# Altium PCB v1_long.PcbDoc (part 2 of 4)
Units mm, origin at the board's own origin, x right, y up, seen from the top; angles counter-clockwise.
Board outline 116.27 x 185.5 mm, 2 copper layers (Top Layer, Bottom Layer); 294 components, 195 nets, 982 pads, 413 vias.
Unrouted connection lines stored in the file: 3.
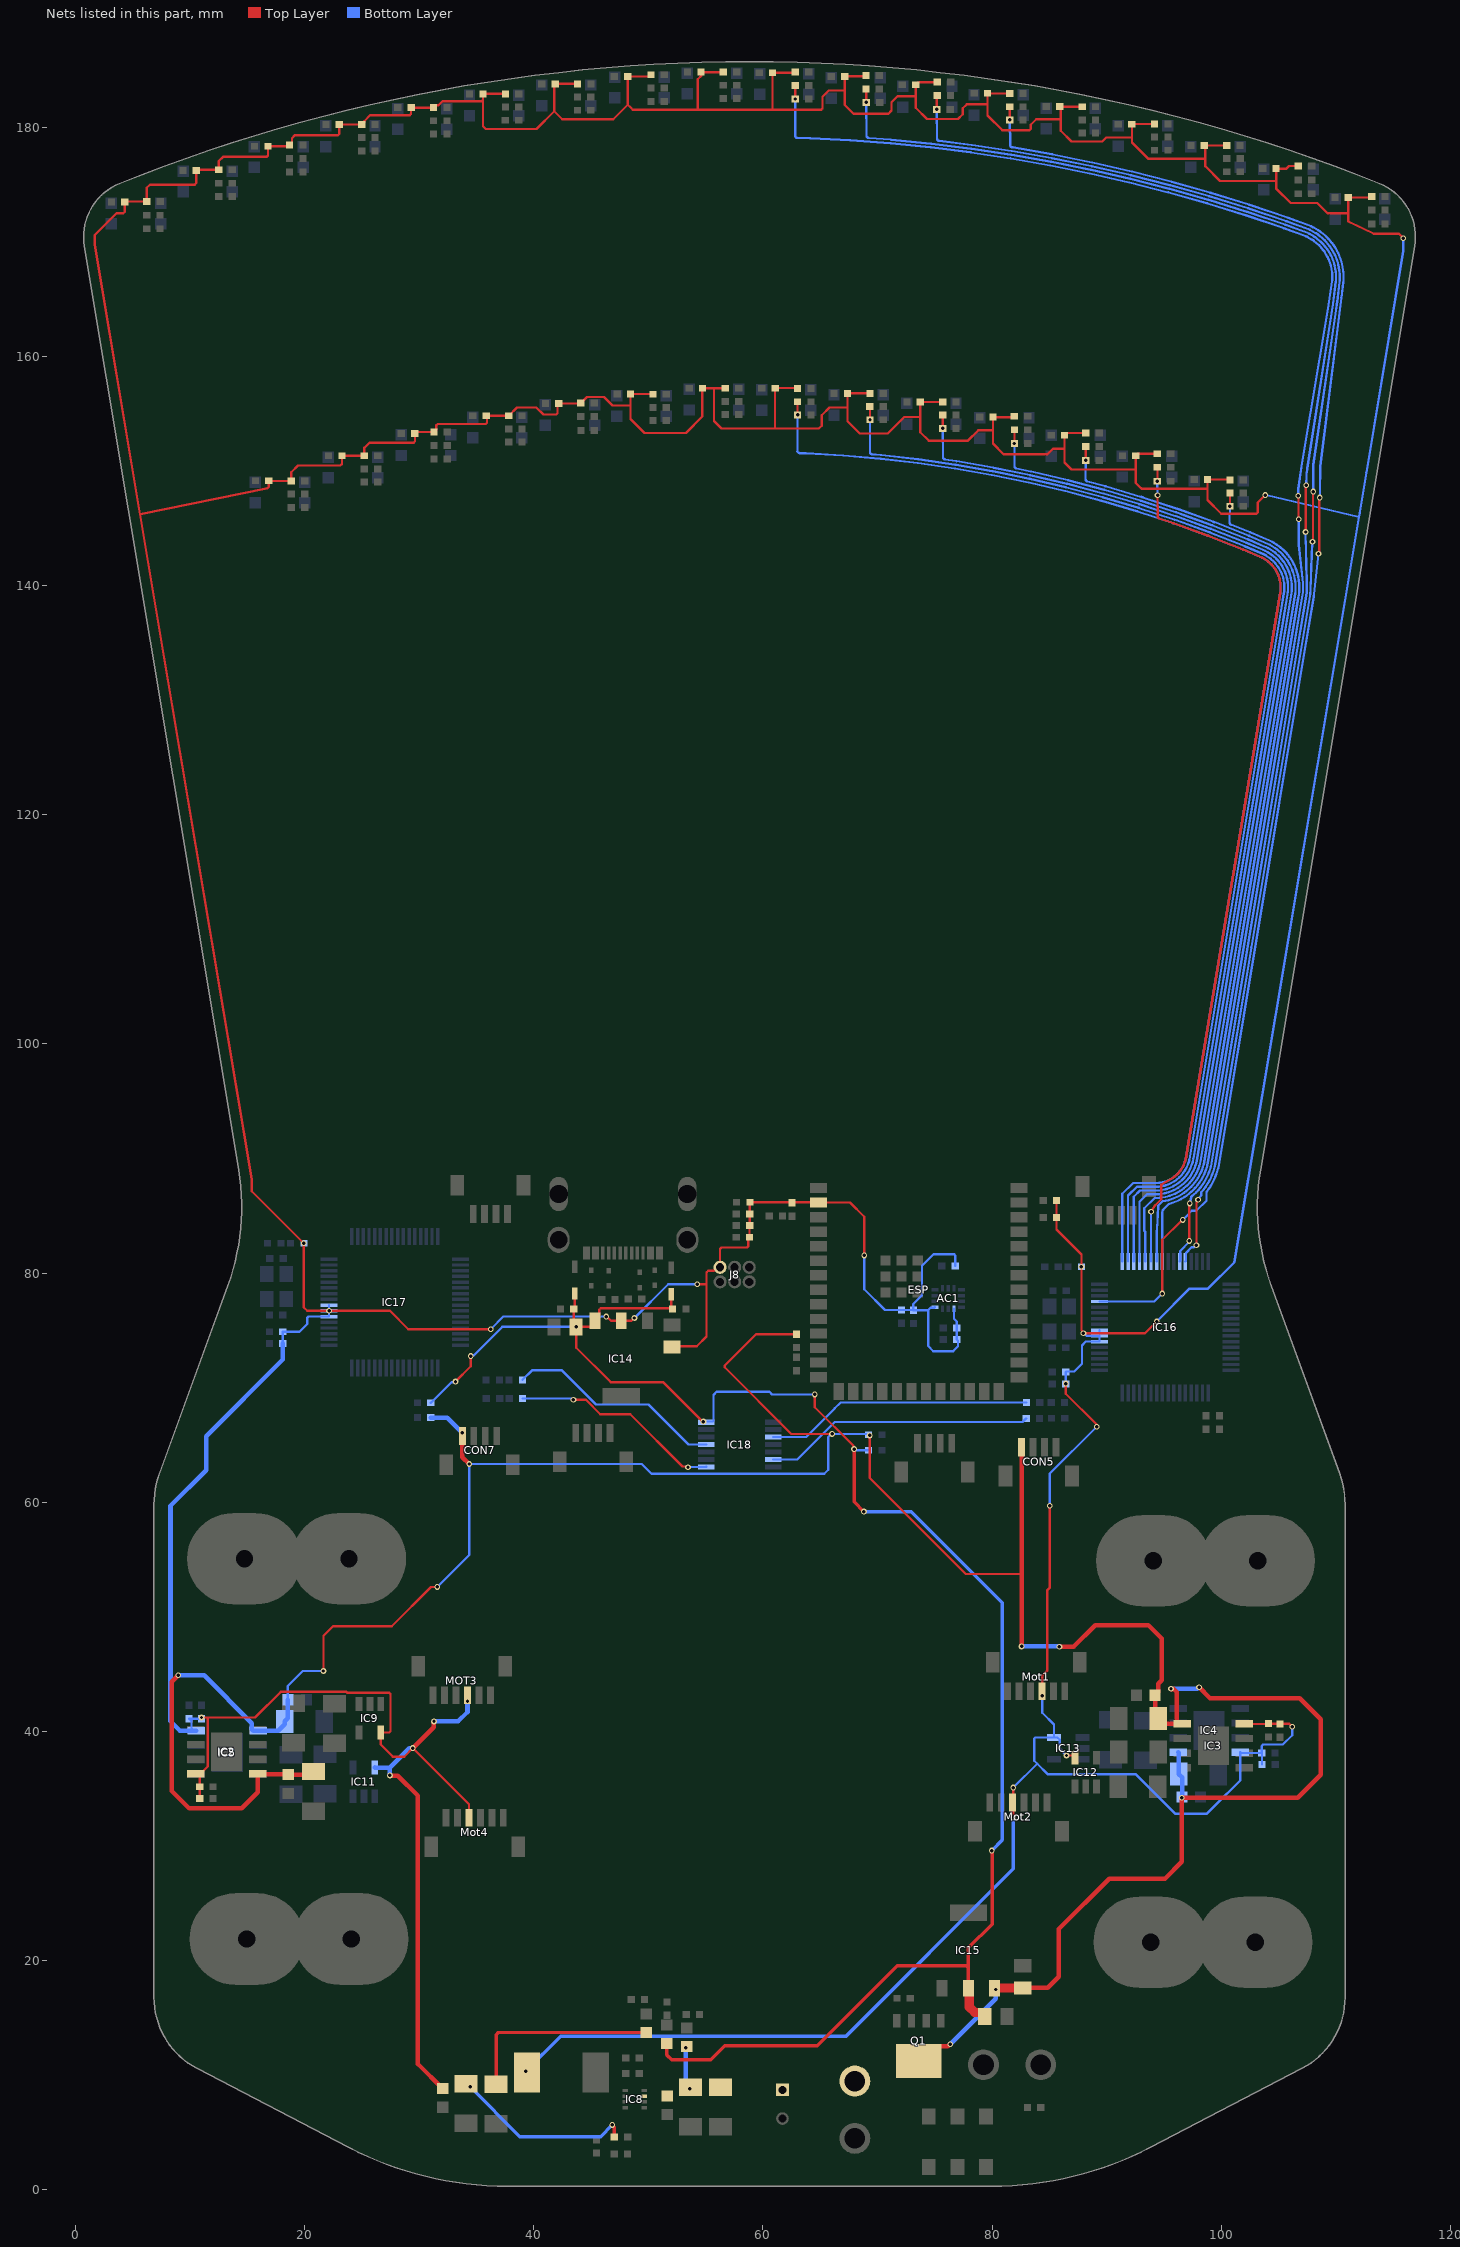
[diagram p2: the nets of this part, all layers, seen from the top]

## Part data
AC1: "Accelerometer", Manufacturer_Name=STMicroelectronics, Mouser Part Number=511-LSM6DSOXTR, Arrow Part Number=LSM6DSOXTR, Arrow Price/Stock=https://www.arrow.com/en/products/lsm6dsoxtr/stmicroelectronics?region=europe, Datasheet Link=https://www.st.com/resource/en/datasheet/lsm6dsox.pdf, Manufacturer_Part_Number=LSM6DSOXTR, Mouser Price/Stock=https://www.mouser.co.uk/ProductDetail/STMicroelectronics/LSM6DSOXTR?qs=l7cgNqFNU1i9dcjzItLpVQ%3D%3D
C1 C2 C4 C5 C6 C7 C8 C9 C10 C11 C12 C13 C14 C15 C16 C17 C18 C19 C20 C21 C22 C23 C24 C26 C27 C28 C30 C31 C32 C33 C34 C35 C36 C37 C38 C39 C40 C41 C42 C43 C44 C45 C46 C47 C48 C49 C50 C51 C52 C53A C53AA C53AB C53AC C53AD C53AE C53AF C53B C53C C53D C53E C53F C53G C53H C53I C53J C53K C53L C53M C53N C53O C53P C53Q C53R C53S C53T C53U C53V C53W C53X C53Y C53Z: library part Capacitor, "MLCC Capacitor"
C25: "Capacitor Polarised", Manufacturer_Name=Nichicon, Arrow Part Number=UVY1V101MED1TD, Arrow Price/Stock=https://www.arrow.com/en/products/uvy1v101med1td/nichicon, Datasheet Link=http://nichicon-us.com/english/products/pdfs/e-uvy.pdf, Height=12.5mm, Manufacturer_Part_Number=UVY1V101MED1TD
D3 D4 D5 D6: "TVS Diode (Bi-directional)", Manufacturer_Name=LRC, Height=0.7mm, Manufacturer_Part_Number=LESD5D5.0CT1G
"DC IN" Fan: "Connector", Manufacturer_Name=Amass, Datasheet Link=https://www.tme.eu/Document/4acc913878197f8c2e30d4b8cdc47230/XT30UPB%20SPEC.pdf, Height=10.7mm, Manufacturer_Part_Number=XT30PB
ESP: "Integrated Circuit", Manufacturer_Name="Espressif Systems", Mouser Part Number=356-ESP32S3WRM1N16R8, Datasheet Link=https://www.espressif.com/sites/default/files/documentation/esp32-s3-wroom-1_wroom-1u_datasheet_en.pdf, Height=3.25mm, Manufacturer_Part_Number=ESP32-S3-WROOM-1-N16R8, Mouser Price/Stock=https://www.mouser.co.uk/ProductDetail/Espressif-Systems/ESP32-S3-WROOM-1-N16R8?qs=Li%252BoUPsLEnvQc9gW6AMhZg%3D%3D
IC2 IC3 IC4 IC5: "Integrated Circuit", Manufacturer_Name="Texas Instruments", Mouser Part Number=595-DRV8251DDAR, Arrow Part Number=DRV8251DDAR, Arrow Price/Stock=https://www.arrow.com/en/products/drv8251ddar/texas-instruments?region=nac, Datasheet Link=https://www.arrow.com/en/products/drv8251ddar/texas-instruments?region=nac, Height=1.7mm, Manufacturer_Part_Number=DRV8251DDAR, Mouser Price/Stock=https://www.mouser.co.uk/ProductDetail/Texas-Instruments/DRV8251DDAR?qs=doiCPypUmgHTzZyfapGahQ%3D%3D
IC6 IC7: "Integrated Circuit", Manufacturer_Name="Lattice Semiconductor", Mouser Part Number=N/A, Datasheet Link=https://www.diodes.com/assets/Datasheets/ds30498.pdf, Height=1.2mm, Manufacturer_Part_Number=BAT760-7, Mouser Price/Stock=https://www.mouser.com/Search/Refine.aspx?Keyword=N%2FA
IC8: "Integrated Circuit", Manufacturer_Name="Texas Instruments", Mouser Part Number=595-TPS62933DRLR, Arrow Part Number=TPS62933DRLR, Arrow Price/Stock=https://www.arrow.com/en/products/tps62933drlr/texas-instruments?utm_currency=USD&region=nac, Datasheet Link=https://www.ti.com/lit/ds/symlink/tps62933.pdf?ts=1626073394234, Height=0.6mm, Manufacturer_Part_Number=TPS62933DRLR, Mouser Price/Stock=https://www.mouser.co.uk/ProductDetail/Texas-Instruments/TPS62933DRLR?qs=Rp5uXu7WBW9fv47wfQVntQ%3D%3D
IC9 IC11 IC12 IC13: "Integrated Circuit", Manufacturer_Name="Texas Instruments", Mouser Part Number=595-INA180A2IDBVR, Arrow Part Number=INA180A2IDBVR, Arrow Price/Stock=https://www.arrow.com/en/products/ina180a2idbvr/texas-instruments?utm_currency=USD&region=nac, Datasheet Link=http://www.ti.com/lit/ds/symlink/ina180.pdf, Height=1.45mm, Manufacturer_Part_Number=INA180A2IDBVR, Mouser Price/Stock=https://www.mouser.co.uk/ProductDetail/Texas-Instruments/INA180A2IDBVR?qs=5aG0NVq1C4wYcJfa99BoHg%3D%3D
IC14: "Integrated Circuit", Manufacturer_Name=Advanced, Datasheet Link=https://datasheet.datasheetarchive.com/originals/distributors/Datasheets-28/DSA-550594.pdf, Height=1.8mm, Manufacturer_Part_Number=AMS1117-3.3
IC15: library part AMS1117-3.3, "Integrated Circuit", Manufacturer_Name=Advanced, Datasheet Link=https://datasheet.datasheetarchive.com/originals/distributors/Datasheets-28/DSA-550594.pdf, Height=1.8mm, Manufacturer_Part_Number=AMS1117-3.3
IC16 IC17: "Integrated Circuit", Manufacturer_Name=STMicroelectronics, Mouser Part Number=511-STM32G070RBT6, Arrow Part Number=STM32G070RBT6, Arrow Price/Stock=https://www.arrow.com/en/products/stm32g070rbt6/stmicroelectronics?utm_currency=USD&region=nac, Datasheet Link=https://componentsearchengine.com/Datasheets/1/STM32G070RBT6.pdf, Height=1.6mm, Manufacturer_Part_Number=STM32G070RBT6, Mouser Price/Stock=https://www.mouser.co.uk/ProductDetail/STMicroelectronics/STM32G070RBT6?qs=l7cgNqFNU1g2MF3TqxTHUQ%3D%3D
IC18: "Integrated Circuit", Manufacturer_Name=onsemi, Mouser Part Number=863-MC74HCT125ADTR2G, Arrow Part Number=MC74HCT125ADTR2G, Arrow Price/Stock=https://www.arrow.com/en/products/mc74hct125adtr2g/on-semiconductor?utm_currency=USD&region=nac, Datasheet Link=https://www.onsemi.com/pub/Collateral/MC74HC125A-D.PDF, Height=1.2mm, Manufacturer_Part_Number=MC74HCT125ADTR2G, Mouser Price/Stock=https://www.mouser.co.uk/ProductDetail/onsemi/MC74HCT125ADTR2G?qs=mB5q98eOMcZnEC08OY8tTw%3D%3D
IC19A IC19AA IC19AB IC19AC IC19AD IC19AE IC19AF IC19B IC19C IC19D IC19E IC19F IC19G IC19H IC19I IC19J IC19K IC19L IC19M IC19N IC19O IC19P IC19Q IC19R IC19S IC19T IC19U IC19V IC19W IC19X IC19Y IC19Z: "Integrated Circuit", Manufacturer_Name=Kingbright, Mouser Part Number=N/A, Datasheet Link=https://componentsearchengine.com/Datasheets/2/KTIR0711S.pdf, Height=1.75mm, Manufacturer_Part_Number=KTIR0711S, Mouser Price/Stock=https://www.mouser.co.uk/ProductDetail/Kingbright/KTIR0711S?qs=2JU0tDl2GZ3YXiPz2j0FpQ%3D%3D
J4: "Connector", Manufacturer_Name="GCT (GLOBAL CONNECTOR TECHNOLOGY)", Mouser Part Number=640-USB4500030A, Datasheet Link=https://componentsearchengine.com/Datasheets/2/USB4500-03-0-A.pdf, Manufacturer_Part_Number=USB4500-03-0-A, Mouser Price/Stock=https://www.mouser.co.uk/ProductDetail/GCT/USB4500-03-0-A?qs=7D1LtPJG0i2mVyw7UtV%2FkQ%3D%3D
J8: "Connector", Manufacturer_Name=SAMTEC, Mouser Part Number=200-FTSH10301FD, Arrow Part Number=FTSH-103-01-F-D, Arrow Price/Stock=https://www.arrow.com/en/products/ftsh-103-01-f-d/samtec, Datasheet Link=http://suddendocs.samtec.com/prints/ftsh-1xx-xx-xxx-d-xxx-xx-mkt.pdf, Manufacturer_Part_Number=FTSH-103-01-F-D, Mouser Price/Stock=https://www.mouser.co.uk/ProductDetail/Samtec/FTSH-103-01-F-D?qs=0lQeLiL1qyb7OHmlWV4egA%3D%3D
L1: library part Inductor, "General pourpouse inductor"
Mot1 Mot2 MOT3 Mot4: "Connector", Arrow Part Number=BM06B-SRSS-TB(LF)(SN), Manufacturer_Name="JST (JAPAN SOLDERLESS TERMINALS)", Mouser Part Number=N/A, Arrow Price/Stock=https://www.arrow.com/en/products/bm06b-srss-tb-lf-sn/jst-manufacturing?region=europe, Datasheet Link=http://www.jst-mfg.com/product/pdf/eng/eSR.pdf, Height=4.25mm, Manufacturer_Part_Number=BM06B-SRSS-TB(LF)(SN), Mouser Price/Stock=https://www.mouser.co.uk/ProductDetail/JST-Commercial/BM06B-SRSS-TBLFSN?qs=IKkN%2F947nfAcbKIXx%2F1kIg%3D%3D
Q1: "P-Mosfet 30V 67A Rds(on) 3.1mR"
R1 R2 R3 R4 R5 R6 R7 R8 R9 R10 R11 R12 R13 R14 R15 R16 R17 R18 R19 R20 R21 R22 R23 R24 R25 R26 R27 R28 R29 R30 R31 R32 R33 R34 R35 R36 R37 R38 R39 R40A R40AA R40AB R40AC R40AD R40AE R40AF R40B R40C R40D R40E R40F R40G R40H R40I R40J R40K R40L R40M R40N R40O R40P R40Q R40R R40S R40T R40U R40V R40W R40X R40Y R40Z R41A R41AA R41AB R41AC R41AD R41AE R41AF R41B R41C R41D R41E R41F R41G R41H R41I R41J R41K R41L R41M R41N R41O R41P R41Q R41R R41S R41T R41U R41V R41W R41X R41Y R41Z R42A R42AA R42AB R42AC R42AD R42AE R42AF R42B R42C R42D R42E R42F R42G R42H R42I R42J R42K R42L R42M R42N R42O R42P R42Q R42R R42S R42T R42U R42V R42W R42X R42Y R42Z R43: library part Resistor, "General pourpouse resistor"
S1: "Switch", Manufacturer_Name="Nidec Copal", Mouser Part Number=229-CL-SB-22B-01T, Datasheet Link=https://www.nidec-copal-electronics.com/e/catalog/switch/cl-sb.pdf, Height=5.5mm, Manufacturer_Part_Number=CL-SB-22B-01T, Mouser Price/Stock=https://www.mouser.co.uk/ProductDetail/Nidec-Components/CL-SB-22B-01T?qs=XeJtXLiO41T0x7ZRpBUZfA%3D%3D
Y1 Y2: "Crystal or Oscillator", Manufacturer_Name=MULTICOMP, Datasheet Link=https://www.farnell.com/datasheets/2864166.pdf, Height=0.8mm, Manufacturer_Part_Number=MCSJK-7U-16.00-12-30-80-B-30

## Free pads (board coordinates)
  oval 10x8 hole 1.5 slot 6 at 0 deg: 5(14.725,55.05) 5(14.925,21.85) 5(23.85,55.05) 5(24.05,21.85) 5(93.85,21.575) 5(94.075,54.875) 5(102.975,21.575) 5(103.2,54.875)

## Via types
v1: diameter 0.5, hole 0.3, Top Layer to Bottom Layer, tented both sides, 349 vias
v2: diameter 0.4, hole 0.25, Top Layer to Bottom Layer, tented both sides, 63 vias
v3: diameter 0.7, hole 0.4, Top Layer to Bottom Layer, tented both sides, 1 vias

## Nets (pads, with @x,y where several pads share a name; then routed paths per layer and width w, separated by ;. In a path a pad name is that pad's centre, name@x,y a point inside that pad or via, vN(x,y) a via of type N, cw(c..) or ccw(c..) an arc to the next point about the centre after c; other vN are vias at no path point)
3.3V: AC1.5 AC1.8 C1.1 C2.1 C4.1 C5.1 C6.1 C9.1 C10.1 C11.1 C13.1 C14.1 C16.1 C17.1 C18.1 C23.1 C24.1 C27.1 C28.1 C33.1 C34.1 C39.1 C43.1 C44.1 C45.1 C46.1 D1.1 ESP.2 IC2.4 IC3.4 IC4.4 IC5.4 IC9.5 IC11.5 IC12.5 IC13.5 IC14.2 IC16.6 IC16.7 IC16.8 IC17.6 IC17.7 IC17.8 J8.2 L1.2 Mot1.3 Mot2.3 MOT3.3 Mot4.3 R2.2 R10.1 R14.2 R15.2 R21.2 R26.2 R27.2 R40A.2 R40AA.2 R40AB.2 R40AC.2 R40AD.2 R40AE.2 R40AF.2 R40B.2 R40C.2 R40D.2 R40E.2 R40F.2 R40G.2 R40H.2 R40I.2 R40J.2 R40K.2 R40L.2 R40M.2 R40N.2 R40O.2 R40P.2 R40Q.2 R40R.2 R40S.2 R40T.2 R40U.2 R40V.2 R40W.2 R40X.2 R40Y.2 R40Z.2 R41A.1 R41AA.1 R41AB.1 R41AC.1 R41AD.1 R41AE.1 R41AF.1 R41B.1 R41C.1 R41D.1 R41E.1 R41F.1 R41G.1 R41H.1 R41I.1 R41J.1 R41K.1 R41L.1 R41M.1 R41N.1 R41O.1 R41P.1 R41Q.1 R41R.1 R41S.1 R41T.1 R41U.1 R41V.1 R41W.1 R41X.1 R41Y.1 R41Z.1 | length 976.3
  Top Layer w0.2: IC2.4@10.463,36.295 IC2.4@10.591,36.295 ; C4.1@10.816,34.125 C1.1@10.816,35.15 10.816,36.07 IC2.4@10.591,36.295 ; v1(10.978,41.193) 11.52,41.193 ; R41C.1@29.267,181.75 29.267,181.191 29.15,181.074 25.699,181.074 25.183,180.558 25.183,180.475 24.983,180.275 R40B.2@24.966,180.275 R41B.1@23.009,180.275 23.009,179.467 22.892,179.35 19.15,179.35 18.883,179.083 18.883,178.675 18.683,178.475 R40A.2@18.666,178.475 18.566,178.375 R41A.1@16.775,178.375 16.775,177.575 16.65,177.45 12.85,177.45 12.482,177.082 R40I.2@12.482,176.325 10.575,176.325 R41I.1@10.525,176.275 10.525,175.175 10.375,175.025 6.475,175.025 6.2,174.75 R40J.2@6.2,173.55 4.35,173.55 4.267,173.467 4.267,172.642 4.15,172.525 3.55,172.525 1.65,170.625 1.65,169.779 5.519,146.753 5.605,146.244 ; R41C.1@29.284,181.75 R40C.2@31.241,181.75 31.441,181.95 31.671,181.95 32.021,182.3 35.433,182.3 35.55,182.417 ; Mot4.3@34.325,32.438 34.325,33.62 v1(29.425,38.52) 28.675,37.77 27.685,37.77 26.625,38.83 IC9.5@26.625,39.875 27.366,39.875 27.483,39.992 27.483,43.243 27.366,43.36 23.702,43.36 23.619,43.443 17.906,43.443 15.655,41.193 11.52,41.193 ; v1(36.225,75.1) 29.025,75.1 27.425,76.7 v1(22.112,76.7) 20.2,76.7 19.9,77 v1(19.9,82.6) 15.364,87.136 15.364,88.147 15.361,88.18 5.605,146.244 ; R40D.2@37.516,182.95 R41D.1@35.55,182.95 35.55,182.417 ; R40L.2@43.807,183.825 R41L.1@41.859,183.825 41.775,183.741 41.775,181.425 ; v1(46.325,76.2) 46.353,76.2 46.728,75.825 IC14.2@47.625,75.825 48.525,75.825 v1(48.775,76.075) ; R41K.1@48.184,184.475 50.066,184.475 R40K.2@50.216,184.625 ; 48.2,184.156 48.2,182 ; R40O.2@50.391,156.725 50.366,156.75 R41O.1@48.434,156.75 48.434,155.75 ; C39.1@52.05,73.535 52.115,73.6 54.225,73.6 55.075,74.45 55.075,79.025 ; v1(54.25,79.025) 55.075,79.025 ; R41M.1@54.584,184.875 54.609,184.85 R40M.2@56.541,184.85 ; 54.625,184.55 54.306,184.231 54.306,181.567 ; 55.439,80.214 55.712,80.214 55.998,80.5 J8.2@56.255,80.5 56.255,82.108 56.372,82.225 58.6,82.225 58.725,82.35 58.725,83.025 C13.1@58.825,83.125 58.825,84.141 C14.1@58.834,84.15 C23.1@58.834,85.15 58.834,86.15 C24.1@58.859,86.175 64.825,86.175 ESP.2@64.85,86.15 67.6,86.15 68.834,84.916 v1(68.834,81.537) ; 55.698,80.2 55.225,80.2 55.075,80.05 55.075,79.025 ; R40N.2@56.707,157.25 55.716,157.25 ; 61.042,153.725 61.042,157.217 61.1,157.275 62.966,157.275 R40AF.2@63.016,157.225 ; R40Y.2@62.816,184.85 62.766,184.8 R41Y.1@60.834,184.8 60.834,181.567 ; R40W.2@68.991,184.55 68.941,184.5 67.127,184.5 67.127,183.249 ; R40AE.2@69.341,156.8 67.4,156.8 R41AE.1@67.375,156.775 67.375,155.575 ; R40X.2@75.198,183.975 73.669,183.975 73.644,183.95 73.534,183.95 R41X.1@73.334,183.75 73.334,182.745 ; R40AD.2@75.691,156.05 R41AD.1@73.734,156.05 73.734,154.733 ; R40H.2@81.541,182.975 79.634,182.975 R41H.1@79.609,183 79.609,182.033 ; Mot2.3@81.8,33.775 81.85,33.825 v1(81.85,35.075) ; R40AC.2@81.941,154.8 81.866,154.725 R41AC.1@80.084,154.725 80.084,153.57 ; v1(84.375,43.075) 84.375,44.83 84.808,45.262 84.808,52.291 85.025,52.508 v1(85.025,59.675) ; R15.2@85.634,86.325 R14.2@85.634,84.85 85.634,83.791 87.8,81.625 v1(87.8,80.55) 87.8,75.006 87.975,74.831 v1(87.975,74.75) 93.359,74.75 v1(94.376,75.767) ; v1(86.431,70.35) 86.431,69.469 89.087,66.813 89.087,66.642 v1(89.145,66.585) ; v1(86.5,37.875) 87.025,37.875 IC12.5@87.225,37.675 ; R40G.2@87.866,181.825 85.934,181.825 86,181.759 86,180.742 ; R40AB.2@88.191,153.35 86.525,153.35 R41AB.1@86.325,153.15 86.325,151.963 ; R40F.2@94.191,180.325 92.209,180.325 92.209,179.15 ; R40AA.2@94.432,151.525 92.725,151.525 R41AA.1@92.55,151.35 92.55,150.162 ; R40E.2@100.482,178.45 R41E.1@98.534,178.45 98.625,178.359 98.625,177.275 ; R40Z.2@100.766,149.25 100.741,149.275 R41Z.1@98.809,149.275 98.809,148.475 ; IC3.4@102.037,40.63 104.096,40.63 C5.1@104.125,40.659 104.15,40.634 C9.1@105.15,40.634 105.941,40.634 v1(106.2,40.375) ; v1(103.85,147.925) 103.2,147.275 103.2,146.417 103.083,146.3 100,146.3 98.809,147.491 98.809,148.475 ; R40U.2@106.741,176.65 105.925,176.65 105.7,176.425 R41U.1@104.8,176.425 104.8,175.35 ; R40V.2@113.141,174 113.041,173.9 R41V.1@111.109,173.9 111.109,172.533 ; v1(115.909,170.356) 115.515,170.75 113.307,170.75 111.109,171.817 111.109,172.533 ; 5.605,146.244 16.742,148.528 16.859,148.645 R41T.1@16.859,149.175 16.884,149.15 R40T.2@18.816,149.15 18.816,149.916 19.4,150.5 23.1,150.5 23.234,150.634 R41S.1@23.234,151.35 R40S.2@25.191,151.35 25.191,152.041 25.65,152.5 29.5,152.5 29.625,152.625 29.625,153.341 29.709,153.425 R40R.2@31.266,153.425 31.283,153.425 31.483,153.625 31.483,154.008 31.6,154.125 35.783,154.125 35.9,154.242 35.9,154.784 R41Q.1@35.834,154.85 R40Q.2@37.791,154.85 37.808,154.85 38.533,155.575 40.2,155.575 40.825,154.95 41.933,154.95 42.05,155.067 42.05,155.8 R41P.1@42.175,155.925 44.066,155.925 R40P.2@44.091,155.95 44.108,155.95 44.635,156.477 46.123,156.477 46.85,155.75 48.434,155.75 ; IC2.4@10.591,36.295 10.9,36.295 11.525,36.92 11.525,41.187 11.52,41.193 ; 35.55,182.417 35.55,180.125 35.8,179.875 40.225,179.875 41.775,181.425 ; 41.775,181.425 42.475,180.725 46.925,180.725 48.2,182 ; 48.2,182 48.425,181.775 48.633,181.567 54.306,181.567 ; 48.434,155.75 48.434,154.566 49.65,153.35 53.275,153.35 54.7,154.775 54.7,157.225 R41N.1@54.725,157.25 55.716,157.25 ; 54.306,181.567 60.834,181.567 ; 55.716,157.25 55.716,154.384 56.375,153.725 64.875,153.725 65.125,153.975 65.125,154.9 65.8,155.575 67.375,155.575 ; 60.834,181.567 65.083,181.567 65.2,181.684 65.2,182.7 65.749,183.249 67.127,183.249 ; 67.127,183.249 67.127,181.998 67.9,181.225 70.95,181.225 71.225,181.5 71.225,182.225 71.745,182.745 73.334,182.745 ; 67.375,155.575 67.375,154.375 68.45,153.3 70.9,153.3 72.333,154.733 73.734,154.733 ; 73.334,182.745 73.334,181.741 74.325,180.75 77.025,180.75 77.45,181.175 77.45,181.7 77.783,182.033 79.609,182.033 ; 73.734,154.733 73.734,153.416 74.475,152.675 77.9,152.675 78.795,153.57 80.084,153.57 ; 79.609,182.033 79.609,181.066 80.9,179.775 83.258,179.775 83.375,179.892 83.375,180.25 83.867,180.742 86,180.742 ; 80.084,153.57 80.084,152.416 81.025,151.475 84.825,151.475 85.313,151.963 86.325,151.963 ; 86,180.742 86,179.725 86.925,178.8 89.625,178.8 89.975,179.15 92.209,179.15 ; 86.325,151.963 86.325,150.775 86.938,150.162 92.55,150.162 ; 92.209,179.15 92.209,178.716 93.65,177.275 98.625,177.275 ; 92.55,150.162 92.55,148.975 92.991,148.534 ccw(c93.132,148.676) 93.134,148.476 94.447,148.486 cw(c94.452,147.906) 94.453,148.486 98.609,148.475 98.809,148.475 ; 98.625,177.275 98.625,176.625 99.9,175.35 104.8,175.35 ; 104.8,175.35 104.8,174.7 106.075,173.425 108.4,173.425 109.292,172.533 111.109,172.533
  Top Layer w0.3: C17.1@34.075,9.202 34.327,8.95 v1(34.425,8.95) ; C16.1@36.7,9.177 36.7,13.511 36.876,13.687 D1.1@49.783,13.687 ; v1(39.3,10.325) 39.4,10.225 L1.2@39.4,10.2 ; v1(46.841,5.621) 46.841,5.567 46.998,5.409 R10.1@46.998,4.55 ; Mot2.3@81.8,33.775 81.825,33.75 81.825,32.5 v1(81.85,32.475)
  Top Layer w0.4: v1(27.425,36.136) 27.444,36.117 28.108,36.117 29.875,34.35 29.875,10.938 C18.1@32.025,8.788 ; v1(29.425,38.52) 31.256,40.351 31.256,40.831 v1(31.275,40.85)
  Bottom Layer w0.2: IC5.4@10.325,40.03 10.1,40.255 10.1,40.882 C2.1@9.9,41.082 C11.1@10.975,41.082 ; C45.1@18.075,73.85 C46.1@18.075,74.875 19.525,74.875 20.2,75.55 20.2,76.083 20.317,76.2 IC17.6@22.112,76.2 v1(22.112,76.7) ; v1(19.9,82.6) R27.2@19.925,82.6 ; IC17.7@22.087,76.725 v1(22.112,76.7) ; IC17.8@22.112,77.2 v1(22.112,76.7) ; v1(36.225,75.1) 37.325,76.2 v1(46.325,76.2) ; v1(48.775,76.075) 51.725,79.025 v1(54.25,79.025) ; v1(68.834,81.537) 68.834,78.591 70.65,76.775 C27.1@72.1,76.775 73.109,76.775 C28.1@73.125,76.759 73.125,77.3 73.883,78.058 73.883,80.633 74.9,81.65 76.667,81.65 76.784,81.533 R21.2@76.784,80.625 ; C28.1@73.126,76.758 74.417,76.758 ; AC1.8@75.025,77.025 74.975,76.975 74.713,76.975 74.708,76.969 74.629,76.969 74.417,76.758 ; AC1.5@76.675,76.875 76.675,76 76.909,75.766 C34.1@76.909,75.2 C33.1@76.909,74.2 77.025,74.084 77.025,73.6 76.6,73.175 74.875,73.175 74.425,73.625 74.425,76.75 74.417,76.758 ; v1(81.85,35.075) 83.937,37.162 ; v1(84.375,43.075) 84.375,41.6 85.4,40.575 IC13.5@85.4,39.45 ; v1(85.025,59.675) 85.025,62.465 v1(89.145,66.585) ; C43.1@86.425,70.325 C44.1@86.425,71.35 86.475,71.4 87.175,71.4 87.85,72.075 87.85,73.675 88.187,74.012 IC16.6@89.387,74.012 IC16.7@89.387,74.512 ; v1(86.5,37.875) 85.9,38.475 85.9,39.25 85.7,39.45 IC13.5@85.4,39.45 ; v1(87.975,74.75) 88.056,74.75 88.294,74.512 IC16.7@89.387,74.512 ; IC16.8@89.387,75.012 IC16.7@89.387,74.512 ; v1(94.376,75.767) 97.246,78.637 98.862,78.637 101.137,80.912 112.034,146.018 ; C10.1@103.566,37.1 103.566,38.075 C6.1@103.541,38.1 ; v1(103.85,147.925) 103.874,147.925 cw(c103.874,147.725) 103.921,147.919 112.034,146.018 ; v1(106.2,40.375) 106.2,39.65 105.378,38.828 103.658,38.828 103.541,38.711 C6.1@103.541,38.1 ; v1(115.909,170.356) 115.909,169.253 115.907,169.221 112.682,149.886 112.121,146.534 112.095,146.378 112.034,146.018 ; 83.937,37.162 83.675,37.425 83.675,39.333 83.792,39.45 IC13.5@85.4,39.45 ; 83.937,37.162 84.85,36.25 92.525,36.25 95.975,32.8 98.775,32.8 99.475,33.5 101.662,35.687 IC4.4@101.662,38.17 101.732,38.1 C6.1@103.541,38.1
  Bottom Layer w0.3: v1(34.425,8.95) 38.775,4.6 45.82,4.6 v1(46.841,5.621) ; v1(39.3,10.325) 42.35,13.375 67.25,13.375 81.85,27.975 v1(81.85,32.475)
  Bottom Layer w0.4: IC5.4@10.513,40.03 10.325,40.03 9.095,40.03 8.27,40.855 8.27,59.67 11.375,62.775 11.375,65.75 18.075,72.45 C45.1@18.075,73.85 ; IC11.5@26.1,36.825 26.125,36.8 27.425,36.8 ; v1(27.425,36.136) 27.425,36.8 ; v1(29.425,38.52) 29.406,38.501 29.126,38.501 27.425,36.8 ; v1(31.275,40.85) 33.375,40.85 34.2,41.675 v1(34.2,42.6)
5V: C7.1 C8.1 C40.1 C41.1 D7.1 IC6.1 IC7.1 IC14.3 IC15.2 IC18.14 R28.2 R34.2 | length 155.1
  Top Layer w0.2: v1(33.15,70.525) 34.475,71.85 v1(34.475,72.75) ; IC7.1@43.575,78.213 43.575,76.941 C8.1@43.484,76.85 43.484,75.506 v1(43.69,75.3) ; IC6.1@52,78.138 52,76.95 C7.1@52.025,76.925 ; C7.1@52.1,76.85 C7.1@52.025,76.925 ; v1(54.8,67.03) 54.725,67.03 51.28,70.475 46.7,70.475 43.69,73.485 v1(43.69,75.3) ; v1(64.525,69.4) 64.525,68.28 67.893,64.912 ; v1(43.69,75.3) 44.96,75.3 45.335,75.675 IC14.3@45.335,75.825 45.71,76.2 45.71,76.808 45.827,76.925 C7.1@52.025,76.925
  Top Layer w0.3: D7.1@51.6,12.712 51.6,11.725 52.025,11.3 55.425,11.3 56.65,12.525 64.75,12.525 71.736,19.511 77.759,19.511 77.935,19.335 ; v1(67.95,64.625) 67.95,60.032 v1(68.81,59.171) ; IC15.2@77.935,17.55 77.935,19.335 ; v1(79.975,29.575) 80,29.55 80,23.15 77.935,21.085 77.935,19.335
  Top Layer w0.8: IC15.2@77.935,17.55 78.01,17.475 78.01,15.919 78.479,15.45 79.188,15.45 79.36,15.279 C41.1@79.36,15.1
  Bottom Layer w0.2: R34.2@31,68.675 31.017,68.675 32.81,70.468 33.093,70.468 v1(33.15,70.525) ; v1(34.475,72.75) 34.532,72.807 34.753,72.807 37.245,75.3 v1(43.69,75.3) ; v1(54.8,67.03) 55.605,67.03 55.675,67.1 55.675,69.358 55.947,69.63 60.565,69.63 60.795,69.4 v1(64.525,69.4) ; v1@68.131,64.525 R28.2@69.216,64.525
  Bottom Layer w0.3: v1(68.81,59.171) 72.954,59.171 80.9,51.225 80.9,30.5 v1(79.975,29.575)
5V_PMW_1: IC18.3 R30.2 | length 23.4
  Bottom Layer w0.2: IC18.3@60.9,65.675 63.77,65.675 66.262,68.167 66.262,68.183 66.78,68.7 R30.2@83.007,68.7
5V_PMW_2: IC18.6 R32.2 | length 23.6
  Bottom Layer w0.2: IC18.6@60.9,63.725 62.989,63.725 66.264,67 82.664,67 82.964,67.3 R32.2@82.982,67.3
5V_PMW_3: IC18.8 R36.2 | length 18.5
  Top Layer w0.2: v1(43.45,68.925) 44.55,68.925 45.8,67.675 48.4,67.675 52.968,63.107 53.393,63.107 v1(53.45,63.05)
  Bottom Layer w0.2: R36.2@39.009,69.05 43.244,69.05 43.369,68.925 v1(43.45,68.925) ; v1(53.45,63.05) 53.462,63.063 55.038,63.063 IC18.8@55.05,63.075
5V_PMW_4: IC18.11 R38.2 | length 19.1
  Bottom Layer w0.2: R38.2@38.993,70.675 39.011,70.675 39.836,71.5 42.45,71.5 45.425,68.525 49.995,68.525 52.105,66.415 53.495,65.025 IC18.11@55.05,65.025
12V: C12.1 C20.1 C21.1 C22.1 C25.1 C30.1 C31.1 C32.1 C35.1 C36.1 C37.1 C38.1 C42.1 CON5.4 CON7.4 D2.1 Fan.2 IC2.5 IC3.5 IC4.5 IC5.5 IC8.3 IC15.3 Q1.5_8 R4.2 R29.2 R35.2 | length 279
  Top Layer w0.2: v1(21.625,45.25) 21.625,48.325 22.46,49.16 27.585,49.16 31.015,52.59 v1(31.565,52.59) ; R4.2@62.925,74.659 59.384,74.659 56.658,71.933 56.658,71.767 62.475,65.95 v1(66.035,65.95) ; v1(69.308,65.822) 69.308,62.117 77.7,53.725 82.575,53.725
  Top Layer w0.4: v1(8.95,44.875) 8.375,44.3 8.375,34.775 9.89,33.26 14.485,33.26 15.887,34.662 IC2.5@15.887,36.295 15.934,36.248 18.503,36.248 C12.1@18.55,36.2 20.473,36.2 C32.1@20.75,36.477 ; v1(33.75,66.05) 33.75,63.925 v1(34.35,63.325) ; v1(53.25,12.35) 53.325,12.425 D2.1@53.325,12.462 ; Q1.5_8@73.6,11.2 74.9,12.5 76.148,12.5 76.323,12.675 v1(76.35,12.675) ; v1(82.575,47.4) 82.575,53.725 CON5.4@82.575,64.775 ; C42.1@82.675,17.585 84.86,17.585 85.825,18.55 85.825,22.725 90.225,27.125 95.1,27.125 96.57,28.595 v1(96.57,34.189) 106.689,34.189 108.7,36.2 108.7,41.05 106.875,42.875 99.025,42.875 v1(98.075,43.825) ; v1(85.879,47.378) 87.114,47.378 88.997,49.26 93.653,49.26 94.825,48.089 94.825,44.432 94.52,44.127 94.52,43.408 C30.1@94.238,43.125 94.238,41.364 C31.1@94.502,41.1 94.972,40.63 IC3.5@96.613,40.63 96.26,40.63 96.135,40.755 96.135,43.416 95.87,43.681 95.644,43.681 v1(95.625,43.7)
  Top Layer w0.8: IC15.3@80.306,17.567 82.658,17.567 C42.1@82.675,17.585
  Bottom Layer w0.2: C37.1@18.512,42.725 18.512,43.951 19.812,45.25 v1(21.625,45.25) ; v1(31.565,52.59) 34.35,55.375 v1(34.35,63.325) 49.42,63.325 50.275,62.47 65.345,62.47 65.7,62.825 65.7,65.683 65.967,65.95 69.141,65.95 R29.2@69.216,65.875 69.269,65.822 v1(69.308,65.822)
  Bottom Layer w0.4: v1(8.95,44.875) 11.2,44.875 15.375,40.7 15.375,40.155 15.5,40.03 17.666,40.03 18.248,40.612 C38.1@18.248,40.85 18.512,41.114 C37.1@18.512,42.725 ; R35.2@31.003,67.372 32.428,67.372 v1(33.75,66.05) ; v1(53.25,12.35) 53.25,9.148 53.587,8.811 v1(53.587,8.784) ; v1(76.35,12.675) 80.306,16.631 v1(80.306,17.445) ; v1(82.575,47.4) 85.856,47.4 v1(85.879,47.378) ; v1(95.625,43.7) 97.923,43.7 98.048,43.825 v1(98.075,43.825) ; IC4.5@96.238,38.17 96.298,38.11 C36.1@96.298,36.25 96.587,35.961 C35.1@96.587,34.25 96.587,34.206 v1(96.57,34.189)
ADC1-0: C53AF.1 IC16.17 R42AF.1 | length 112.9
  Top Layer w0.2: v1(63.016,154.925) R42AF.1@63.016,156.075
  Bottom Layer w0.2: v1(63.016,154.925) 63.016,151.741 63,151.725 63.086,151.639 ccw(c63.227,151.781) 63.146,151.598 ccw(c63.228,151.781) 63.221,151.581 63.723,151.566 cw(c63.697,150.667) 63.751,151.565 66.992,151.378 cw(c66.94,150.479) 67.018,151.376 70.255,151.095 cw(c70.177,150.198) 70.283,151.092 73.505,150.718 cw(c73.404,149.824) 73.534,150.714 76.747,150.247 cw(c76.619,149.356) 76.774,150.243 79.974,149.683 cw(c79.819,148.796) 80,149.678 83.18,149.026 cw(c83.002,148.144) 83.21,149.019 86.369,148.276 86.37,148.276 cw(c86.164,147.4) 86.397,148.269 86.399,148.269 89.534,147.435 cw(c89.304,146.565) 89.562,147.427 89.563,147.427 92.673,146.503 cw(c92.418,145.64) 92.7,146.495 95.782,145.481 ; IC16.17@91.375,81 91.375,86.91 92.325,87.86 94.437,87.86 ccw(c94.437,88.76) 94.594,87.874 94.904,87.929 ccw(c94.747,88.815) 95.058,87.971 95.35,88.078 ccw(c95.043,88.924) 95.495,88.145 95.497,88.147 95.767,88.304 ccw(c95.315,89.083) 95.897,88.396 96.137,88.599 ccw(c95.556,89.286) 96.249,88.712 96.45,88.954 ccw(c95.757,89.529) 96.54,89.084 96.695,89.358 ccw(c95.913,89.803) 96.761,89.502 96.866,89.799 ccw(c96.018,90.1) 96.906,89.953 ccw(c96.018,90.1) 96.906,89.955 105.15,139.376 ccw(c104.262,139.524) 105.15,139.378 105.177,139.539 ccw(c104.29,139.689) 105.177,139.541 ccw(c104.29,139.689) 105.19,139.692 105.189,140.022 ccw(c104.289,140.022) 105.177,140.173 105.121,140.502 ccw(c104.234,140.351) 105.084,140.647 104.975,140.959 104.975,140.961 ccw(c104.124,140.667) 104.912,141.101 104.755,141.389 104.754,141.39 ccw(c103.964,140.959) 104.67,141.518 104.669,141.519 104.465,141.778 ccw(c103.757,141.222) 104.362,141.888 104.115,142.112 ccw(c103.51,141.446) 103.997,142.203 103.717,142.383 103.716,142.384 ccw(c103.23,141.626) 103.583,142.454 103.582,142.454 103.431,142.519 ccw(c103.076,141.692) 103.428,142.52 103.426,142.521 101.938,143.158 ccw(c101.583,142.331) 101.91,143.169 101.909,143.17 98.891,144.359 ccw(c98.56,143.522) 98.864,144.369 95.811,145.471 ccw(c95.504,144.625) 95.784,145.481
ADC1-1: C53AE.1 IC16.18 R42AE.1 | length 106.5
  Top Layer w0.2: R42AE.1@69.332,155.65 69.341,155.641 v1(69.341,154.5)
  Bottom Layer w0.2: 69.338,151.685 ccw(c69.538,151.686) 69.52,151.487 70.282,151.42 cw(c70.177,150.198) 70.318,151.417 73.545,151.042 cw(c73.404,149.824) 73.581,151.038 76.794,150.571 cw(c76.619,149.356) 76.83,150.565 80.031,150.005 cw(c79.819,148.796) 80.067,149.998 80.737,149.86 83.245,149.346 cw(c83.002,148.144) 83.285,149.338 86.443,148.595 cw(c86.164,147.4) 86.482,148.585 89.619,147.751 cw(c89.304,146.565) 89.655,147.741 92.768,146.816 cw(c92.418,145.64) 92.803,146.805 95.886,145.792 cw(c95.504,144.625) 95.922,145.779 98.977,144.676 cw(c98.56,143.522) 99.012,144.663 102.031,143.473 cw(c101.583,142.331) 102.067,143.458 103.712,142.754 cw(c103.23,141.626) 103.894,142.658 104.173,142.479 cw(c103.51,141.446) 104.336,142.354 104.582,142.13 cw(c103.757,141.222) 104.723,141.979 104.928,141.719 cw(c103.964,140.959) 105.041,141.547 105.199,141.258 cw(c104.124,140.667) 105.283,141.069 105.393,140.754 cw(c104.234,140.351) 105.443,140.555 105.499,140.228 cw(c104.289,140.022) 105.516,140.024 105.517,139.69 cw(c104.29,139.689) 105.5,139.486 105.473,139.323 cw(c104.262,139.524) 105.472,139.321 105.224,137.83 101.423,115.046 97.229,89.898 cw(c96.018,90.1) 97.174,89.689 97.069,89.393 cw(c95.913,89.803) 96.98,89.197 96.824,88.923 cw(c95.757,89.529) 96.701,88.745 96.501,88.504 cw(c95.556,89.286) 96.349,88.35 96.108,88.146 cw(c95.315,89.083) 95.933,88.022 95.661,87.864 cw(c95.043,88.924) 95.465,87.772 95.171,87.664 cw(c94.747,88.815) 94.962,87.607 94.651,87.552 cw(c94.437,88.76) 94.437,87.533 92.652,87.533 91.875,86.756 IC16.18@91.875,81 ; 69.338,151.686 v1(69.341,154.5)
ADC1-2: C53AD.1 IC16.19 R42AD.1 | length 100.1
  Top Layer w0.2: v1(75.691,153.75) R42AD.1@75.691,154.9
  Bottom Layer w0.2: v1(75.691,153.75) 75.721,151.228 ; 75.721,151.227 ccw(c75.921,151.23) 75.891,151.032 76.843,150.894 cw(c76.619,149.356) 76.889,150.886 80.085,150.327 cw(c79.819,148.796) 80.133,150.318 83.314,149.666 cw(c83.002,148.144) 83.361,149.656 86.518,148.913 cw(c86.164,147.4) 86.566,148.901 89.702,148.067 ; 89.702,148.067 cw(c89.304,146.565) 89.749,148.054 92.858,147.13 cw(c92.418,145.64) 92.906,147.116 95.987,146.102 cw(c95.504,144.625) 96.034,146.086 99.086,144.984 cw(c98.56,143.522) 99.133,144.967 102.152,143.777 cw(c101.583,142.331) 102.197,143.758 103.686,143.121 cw(c103.076,141.692) 103.689,143.12 103.839,143.056 cw(c103.23,141.626) 104.07,142.934 104.348,142.755 cw(c103.51,141.446) 104.555,142.597 104.802,142.372 cw(c103.757,141.222) 104.978,142.183 105.184,141.921 cw(c103.964,140.959) 105.327,141.705 105.487,141.413 cw(c104.124,140.667) 105.593,141.175 105.701,140.862 cw(c104.234,140.351) 105.766,140.609 105.821,140.285 cw(c104.289,140.022) 105.843,140.024 105.844,139.691 cw(c104.29,139.689) 105.822,139.433 105.795,139.267 105.417,137.002 ; IC16.19@92.375,81 92.375,86.656 92.925,87.206 94.437,87.206 ccw(c94.437,88.76) 94.708,87.23 95.019,87.285 ccw(c94.747,88.815) 95.283,87.357 95.578,87.465 ccw(c95.043,88.924) 95.825,87.581 96.097,87.739 ccw(c95.315,89.083) 96.321,87.898 96.561,88.101 ccw(c95.556,89.286) 96.752,88.294 96.953,88.536 ccw(c95.757,89.529) 97.108,88.761 97.263,89.034 ccw(c95.913,89.803) 97.378,89.284 97.482,89.579 ccw(c96.018,90.1) 97.551,89.846 97.577,90 105.417,137.001
ADC1-3: C53AC.1 IC16.20 R42AC.1 | length 93.4
  Top Layer w0.2: v1(81.95,152.425) R42AC.1@81.95,153.625
  Bottom Layer w0.2: v1(81.95,152.425) 81.96,150.44 ccw(c82.16,150.441) 82.12,150.245 83.379,149.987 cw(c83.002,148.144) 83.432,149.975 86.595,149.231 cw(c86.164,147.4) 86.649,149.217 89.787,148.383 cw(c89.304,146.565) 89.84,148.368 92.954,147.443 cw(c92.418,145.64) 93.008,147.426 96.092,146.412 cw(c95.504,144.625) 96.143,146.395 96.776,146.166 99.199,145.291 cw(c98.56,143.522) 99.25,145.272 102.272,144.081 cw(c101.583,142.331) 102.323,144.06 103.969,143.356 cw(c103.23,141.626) 104.247,143.208 104.527,143.029 cw(c103.51,141.446) 104.775,142.839 105.022,142.614 cw(c103.757,141.222) 105.235,142.385 105.441,142.125 cw(c103.964,140.959) 105.614,141.862 105.774,141.57 cw(c104.124,140.667) 105.902,141.282 106.01,140.968 cw(c104.234,140.351) 106.088,140.665 106.144,140.336 cw(c104.289,140.022) 106.17,140.025 106.171,139.692 cw(c104.29,139.689) 106.145,139.379 104.775,131.167 97.874,89.791 cw(c96.018,90.1) 97.79,89.469 97.686,89.174 cw(c95.913,89.803) 97.548,88.873 97.393,88.6 cw(c95.757,89.529) 97.204,88.327 97.004,88.086 cw(c95.556,89.286) 96.771,87.85 96.532,87.648 cw(c95.315,89.083) 96.262,87.457 95.989,87.298 cw(c95.043,88.924) 95.689,87.157 95.396,87.05 cw(c94.747,88.815) 95.076,86.964 94.765,86.908 cw(c94.437,88.76) 94.437,86.879 93.525,86.879 92.875,86.229 IC16.20@92.875,81
ADC1-4: C53AB.1 IC16.21 R42AB.1 | length 86.9
  Top Layer w0.2: v1(88.191,150.95) R42AB.1@88.191,152.15
  Bottom Layer w0.2: v1(88.191,150.95) 88.166,149.309 ccw(c88.366,149.306) 88.314,149.113 89.846,148.706 89.871,148.699 cw(c89.304,146.565) 89.933,148.682 89.978,148.668 93.018,147.765 93.046,147.757 cw(c92.418,145.64) 93.108,147.737 93.154,147.722 96.162,146.733 96.193,146.723 cw(c95.504,144.625) 96.256,146.702 96.296,146.687 ; IC16.21@93.375,81 93.375,83.602 93.295,83.682 93.295,85.647 94.2,86.552 94.437,86.552 ccw(c94.437,88.76) 94.822,86.586 95.134,86.642 ccw(c94.747,88.815) 95.508,86.743 95.802,86.85 ccw(c95.043,88.924) 96.154,87.016 96.426,87.174 ccw(c95.315,89.083) 96.744,87.399 96.982,87.601 ccw(c95.556,89.286) 97.256,87.877 97.455,88.118 ccw(c95.757,89.529) 97.677,88.438 97.833,88.712 ccw(c95.913,89.803) 97.994,89.065 98.099,89.362 ccw(c96.018,90.1) 98.196,89.737 106.245,137.988 106.467,139.324 ccw(c104.29,139.689) 106.498,139.694 106.497,140.025 ccw(c104.289,140.022) 106.466,140.392 106.411,140.719 ccw(c104.234,140.351) 106.319,141.076 106.21,141.391 ccw(c104.124,140.667) 106.061,141.727 105.902,142.018 ccw(c103.964,140.959) 105.699,142.326 105.492,142.588 ccw(c103.757,141.222) 105.242,142.856 104.995,143.081 ccw(c103.51,141.446) 104.703,143.304 104.422,143.484 ccw(c103.23,141.626) 104.098,143.656 102.451,144.361 ccw(c101.583,142.331) 102.392,144.385 99.408,145.561 99.37,145.576 ccw(c98.56,143.522) 99.31,145.599 99.277,145.611 96.296,146.687
ADC1-5: C53AA.1 IC16.22 R42AA.1 | length 78.2
  Top Layer w0.2: v1(93.88,85.355) 94.238,85.913 94.775,86.45 94.775,87.727 95.768,88.305 ccw(c95.315,89.083) 95.897,88.396 96.138,88.599 ccw(c95.556,89.286) 96.249,88.712 96.45,88.954 ccw(c95.757,89.529) 96.54,89.084 96.695,89.358 ccw(c95.913,89.803) 96.761,89.502 96.866,89.799 ccw(c96.018,90.1) 96.906,89.951 ccw(c96.018,90.1) 96.906,89.953 105.15,139.377 105.177,139.541 ccw(c104.29,139.689) 105.19,139.692 105.189,140.022 ccw(c104.289,140.022) 105.177,140.173 105.121,140.499 ccw(c104.234,140.351) 105.084,140.647 105.083,140.648 104.974,140.962 ccw(c104.124,140.667) 104.914,141.099 104.754,141.39 ccw(c103.964,140.959) 104.671,141.516 104.464,141.779 ccw(c103.757,141.222) 104.362,141.888 104.117,142.111 ccw(c103.51,141.446) 103.995,142.204 103.994,142.205 103.716,142.384 ccw(c103.23,141.626) 103.584,142.454 103.43,142.519 101.937,143.158 ccw(c101.583,142.331) 101.913,143.168 98.892,144.359 ccw(c98.56,143.522) 98.863,144.37 95.81,145.472 ccw(c95.504,144.625) 95.786,145.48 94.592,145.873 cw(c94.655,146.062) 94.455,146.061 ; v1(94.425,149.125) 94.441,149.325 R42AA.1@94.441,150.375 ; v1(94.452,147.906) 94.455,146.062
  Bottom Layer w0.2: IC16.22@93.875,81 93.875,84.705 v1(93.88,85.355) ; v1(94.425,149.125) v1(94.452,147.906)
ADC1-6: C53Z.1 IC16.23 R42Z.1 | length 73.2
  Top Layer w0.2: v1(100.766,146.95) R42Z.1@100.766,148.1
  Bottom Layer w0.2: IC16.23@94.375,81 94.375,83.696 94.396,83.717 94.514,85.893 94.886,86.265 95.41,86.358 95.913,86.543 ccw(c95.043,88.924) 95.915,86.544 ccw(c95.043,88.924) 96.318,86.733 96.591,86.892 ccw(c95.315,89.083) 96.955,87.149 97.194,87.352 ccw(c95.556,89.286) 97.507,87.668 97.708,87.911 ccw(c95.757,89.529) 97.961,88.276 98.117,88.551 ccw(c95.913,89.803) 98.302,88.956 98.407,89.252 ccw(c96.018,90.1) 98.519,89.684 106.567,137.935 106.734,138.936 106.79,139.272 ccw(c104.29,139.689) 106.825,139.692 106.824,140.025 ccw(c104.289,140.022) 106.788,140.448 106.733,140.773 ccw(c104.234,140.351) 106.628,141.184 106.627,141.185 106.613,141.226 106.519,141.498 ccw(c104.124,140.667) 106.348,141.883 106.189,142.173 ccw(c103.964,140.959) 105.955,142.528 105.785,142.745 ; 100.73,145.532 ccw(c100.93,145.528) 100.856,145.342 102.477,144.703 102.512,144.689 cw(c101.583,142.331) 102.58,144.661 ; 100.73,145.533 v1(100.766,146.95) ; 102.581,144.661 102.586,144.659 104.225,143.957 cw(c103.23,141.626) 104.6,143.759 104.877,143.581 cw(c103.51,141.446) 105.189,143.346 105.19,143.345 105.211,143.326 105.218,143.32 105.439,143.119 ccw(c105.573,143.268) 105.443,143.115 105.476,143.087 cw(c105.346,142.935) 105.488,143.076 105.749,142.815 ccw(c105.942,142.869) 105.784,142.746
ADC1-7: C53Y.1 IC16.24 R42Y.1 | length 143.4
  Top Layer w0.2: v1(62.816,182.5) R42Y.1@62.816,183.675 ; v1(106.729,147.857) 106.752,147.834 106.752,145.823 v1(106.775,145.8)
  Bottom Layer w0.2: v1(62.816,182.5) 62.809,179.3 ccw(c63.009,179.3) 63.004,179.1 64.096,179.073 cw(c64.074,178.173) 64.119,179.072 67.614,178.897 cw(c67.569,177.998) 67.636,178.895 71.126,178.633 cw(c71.059,177.736) 71.149,178.631 74.631,178.282 cw(c74.541,177.386) 74.653,178.279 78.126,177.843 cw(c78.014,176.95) 78.148,177.84 81.609,177.317 cw(c81.474,176.427) 81.632,177.313 85.073,176.705 85.075,176.705 cw(c84.92,175.818) 85.103,176.699 ; 85.104,176.699 88.527,176.005 88.531,176.004 cw(c88.35,175.123) 88.553,176 88.555,175.999 91.963,175.219 cw(c91.762,174.342) 91.985,175.214 95.374,174.349 95.377,174.348 cw(c95.153,173.476) 95.399,174.342 98.763,173.393 cw(c98.521,172.526) 98.789,173.385 102.131,172.352 cw(c101.865,171.492) 102.152,172.345 105.465,171.229 cw(c105.181,170.375) 105.494,171.219 107.378,170.531 cw(c107.07,169.685) 107.519,170.465 107.971,170.205 cw(c107.521,169.425) 108.099,170.115 108.498,169.781 cw(c107.921,169.091) 108.609,169.671 108.945,169.273 cw(c108.257,168.692) 109.035,169.146 109.297,168.695 cw(c108.519,168.242) 109.363,168.555 109.543,168.069 cw(c108.7,167.754) 109.586,167.914 109.586,167.912 109.679,167.404 cw(c108.794,167.241) 109.694,167.249 109.694,167.247 109.698,166.727 cw(c108.798,166.72) 109.688,166.585 cw(c108.798,166.72) 109.688,166.583 109.325,164.201 107.061,150.716 106.729,148.443 v1(106.729,147.857) ; IC16.24@94.875,81 94.87,81.638 94.87,84.45 cw(c95.45,84.45) 94.87,84.453 94.87,85.315 94.876,85.395 cw(c95.076,85.393) 94.933,85.533 ; 94.934,85.534 95.4,86 96.052,86.246 ccw(c95.043,88.924) 96.483,86.45 96.755,86.609 ccw(c95.315,89.083) 97.166,86.9 97.405,87.102 ccw(c95.556,89.286) 97.759,87.459 97.959,87.7 ccw(c95.757,89.529) 98.245,88.114 98.246,88.115 98.401,88.389 ccw(c95.913,89.803) 98.611,88.848 98.716,89.143 ccw(c96.018,90.1) 98.842,89.632 101.894,107.93 105.998,132.538 107.112,139.217 ccw(c104.29,139.689) 107.152,139.693 107.151,140.213 107.151,140.224 106.775,143.596 v1(106.775,145.8)
ADC1-8: C53W.1 IC16.27 R42W.1 | length 136.4
  Top Layer w0.2: R42W.1@68.991,183.375 69.016,183.35 v1(69.016,182.2) ; v1(97.224,82.802) 97.224,86.035 v1(97.264,86.075) ; v1(107.375,144.7) 107.4,144.725 107.4,148.75 v1(107.425,148.775)
  Bottom Layer w0.2: v1(69.016,182.2) 69.035,179.303 ccw(c69.235,179.304) 69.22,179.104 71.149,178.959 cw(c71.059,177.736) 71.181,178.957 74.664,178.607 cw(c74.541,177.386) 74.696,178.604 78.165,178.168 cw(c78.014,176.95) 78.197,178.163 81.657,177.64 cw(c81.474,176.427) 81.69,177.635 85.133,177.026 cw(c84.92,175.818) 85.165,177.02 88.592,176.326 cw(c88.35,175.123) 88.624,176.319 92.036,175.538 cw(c91.762,174.342) 92.067,175.531 95.456,174.665 cw(c95.153,173.476) 95.487,174.657 98.854,173.707 cw(c98.521,172.526) 98.885,173.698 102.227,172.664 cw(c101.865,171.492) 102.256,172.655 105.573,171.537 cw(c105.181,170.375) 105.604,171.527 107.246,170.927 107.49,170.838 cw(c107.07,169.685) 107.684,170.747 108.134,170.488 cw(c107.521,169.425) 108.309,170.365 108.707,170.032 cw(c107.921,169.091) 108.859,169.881 109.194,169.485 cw(c108.257,168.692) 109.317,169.31 109.579,168.86 cw(c108.519,168.242) 109.671,168.667 109.851,168.181 cw(c108.7,167.754) 109.907,167.973 110.001,167.463 cw(c108.794,167.241) 110.021,167.25 110.025,166.731 cw(c108.798,166.72) 110.016,166.571 109.775,164.6 107.511,150.239 107.511,150.238 ccw(c107.55,150.232) 107.511,150.232 ; IC16.27@96.375,81 96.425,81.05 96.425,81.93 97.224,82.729 v1(97.224,82.802) ; v1(97.264,86.075) 97.39,86.651 97.455,86.715 97.617,86.853 ccw(c95.556,89.286) 98.011,87.251 98.211,87.492 ccw(c95.757,89.529) 98.53,87.954 98.531,87.955 98.686,88.228 ccw(c95.913,89.803) 98.918,88.737 99.023,89.031 ccw(c96.018,90.1) 99.164,89.577 102.282,108.27 106.41,133.019 107.435,139.162 ccw(c104.29,139.689) 107.479,139.695 107.478,140.224 ccw(c107.151,140.224) 107.478,140.233 v1(107.375,144.7) ; v1(107.425,148.775) 107.45,149.682 107.451,149.72 107.451,149.729 107.509,150.202 ccw(c107.311,150.228) 107.509,150.205 107.511,150.216 107.511,150.228 107.511,150.231
ADC1-9: C53X.1 IC16.28 R42X.1 | length 130.5
  Top Layer w0.2: v1(75.182,181.6) 75.182,182.775 R42X.1@75.207,182.8 ; v1(97.844,82.413) 97.844,86.182 97.989,86.327 v1(97.989,86.408) ; v1(107.975,143.85) 108.02,143.895 108.02,147.733 108.021,147.734 v1(108.05,148.225)
  Bottom Layer w0.2: v1(75.182,181.6) 75.195,179.046 ; 75.195,179.045 ccw(c75.395,179.047) 75.37,178.849 78.205,178.492 cw(c78.014,176.95) 78.247,178.486 81.704,177.964 cw(c81.474,176.427) 81.746,177.957 85.188,177.349 cw(c84.92,175.818) 85.231,177.341 88.658,176.646 cw(c88.35,175.123) 88.7,176.637 92.106,175.857 cw(c91.762,174.342) 92.149,175.847 95.537,174.982 cw(c95.153,173.476) 95.576,174.971 98.943,174.022 cw(c98.521,172.526) 98.983,174.01 102.321,172.977 cw(c101.865,171.492) 102.362,172.964 105.674,171.848 cw(c105.181,170.375) 105.717,171.833 107.6,171.146 cw(c107.07,169.685) 107.848,171.03 108.295,170.772 cw(c107.521,169.425) 108.52,170.615 108.916,170.284 cw(c107.921,169.091) 109.11,170.091 109.443,169.696 cw(c108.257,168.692) 109.6,169.475 109.862,169.025 cw(c108.519,168.242) 109.977,168.782 110.158,168.293 cw(c108.7,167.754) 110.229,168.033 110.323,167.521 cw(c108.794,167.241) 110.348,167.253 110.351,166.951 110.352,166.732 cw(c108.798,166.72) 110.341,166.531 110.13,164.806 110.1,164.56 cw(c109.775,164.6) 110.098,164.549 110.022,164.064 108.052,150.548 108.05,150.519 v1(108.05,148.225) ; IC16.28@96.875,81 96.925,81.05 96.925,81.759 97.424,82.257 97.607,82.257 97.763,82.413 v1(97.844,82.413) ; v1(97.989,86.408) 97.989,86.489 98.263,86.763 98.263,87.042 98.463,87.284 ccw(c95.757,89.529) 98.816,87.795 98.97,88.066 ccw(c95.913,89.803) 99.227,88.628 99.331,88.922 ccw(c96.018,90.1) 99.486,89.522 102.642,108.439 106.797,133.35 107.757,139.107 ccw(c104.29,139.689) 107.803,139.563 107.92,142.817 cw(c108.5,142.8) 107.921,142.831 107.921,142.843 v1(107.975,143.85)
ADC1-10: C53H.1 IC16.13 R42H.1 | length 133.7
  Top Layer w0.2: v1(81.541,180.675) R42H.1@81.541,181.825 ; v1(94.857,78.206) 94.857,82.896 96.597,84.636 v1(96.641,84.636) ; v1(108.5,142.8) 108.555,142.855 108.555,147.655 v1(108.6,147.7)
  Bottom Layer w0.2: v1(81.541,180.675) 81.578,178.483 ccw(c81.778,178.486) 81.747,178.288 ; 81.748,178.288 cw(c81.474,176.427) 81.749,178.288 cw(c81.474,176.427) 81.805,178.279 85.248,177.67 cw(c84.92,175.818) 85.298,177.661 88.724,176.966 cw(c88.35,175.123) 88.77,176.956 92.181,176.176 cw(c91.762,174.342) 92.227,176.165 95.617,175.299 cw(c95.153,173.476) 95.665,175.286 99.03,174.337 cw(c98.521,172.526) 99.082,174.322 102.419,173.289 102.42,173.289 cw(c101.865,171.492) 102.467,173.274 105.78,172.158 cw(c105.181,170.375) 105.831,172.14 107.713,171.453 107.715,171.452 cw(c107.07,169.685) 108.011,171.314 108.461,171.054 cw(c107.521,169.425) 108.728,170.868 109.128,170.534 cw(c107.921,169.091) 109.36,170.302 109.692,169.908 cw(c108.257,168.692) 109.882,169.64 110.144,169.191 cw(c108.519,168.242) 110.283,168.895 110.464,168.407 cw(c108.7,167.754) 110.551,168.091 110.644,167.581 cw(c108.794,167.241) 110.675,167.256 110.679,166.735 cw(c108.798,166.72) 110.665,166.491 110.5,165.139 ; IC16.13@89.387,77.512 94.163,77.512 v1(94.857,78.206) ; v1(96.641,84.636) 96.648,84.636 97.441,85.429 97.83,85.429 98.715,86.314 98.715,87.076 ccw(c95.757,89.529) 99.101,87.634 99.255,87.905 ccw(c95.913,89.803) 99.535,88.52 99.639,88.812 ccw(c96.018,90.1) 99.809,89.469 103.025,108.75 107.193,133.739 108.077,139.036 108.078,139.045 ccw(c104.29,139.689) 108.109,139.266 v1(108.5,142.8) ; v1(108.6,147.7) 108.629,148.191 ccw(c108.05,148.225) 108.63,148.221 108.645,150.354 cw(c109.225,150.35) 108.65,150.422 110.424,164.518 ccw(c109.775,164.6) 110.424,164.521 110.5,165.139